# Altium PCB PCB1.PcbDoc
Units mm, origin at the board's own origin, x right, y up, seen from the top; angles counter-clockwise.
Board outline 70 x 60 mm, 2 copper layers (Top Layer, Bottom Layer); 83 components, 73 nets, 228 pads, 20 vias.
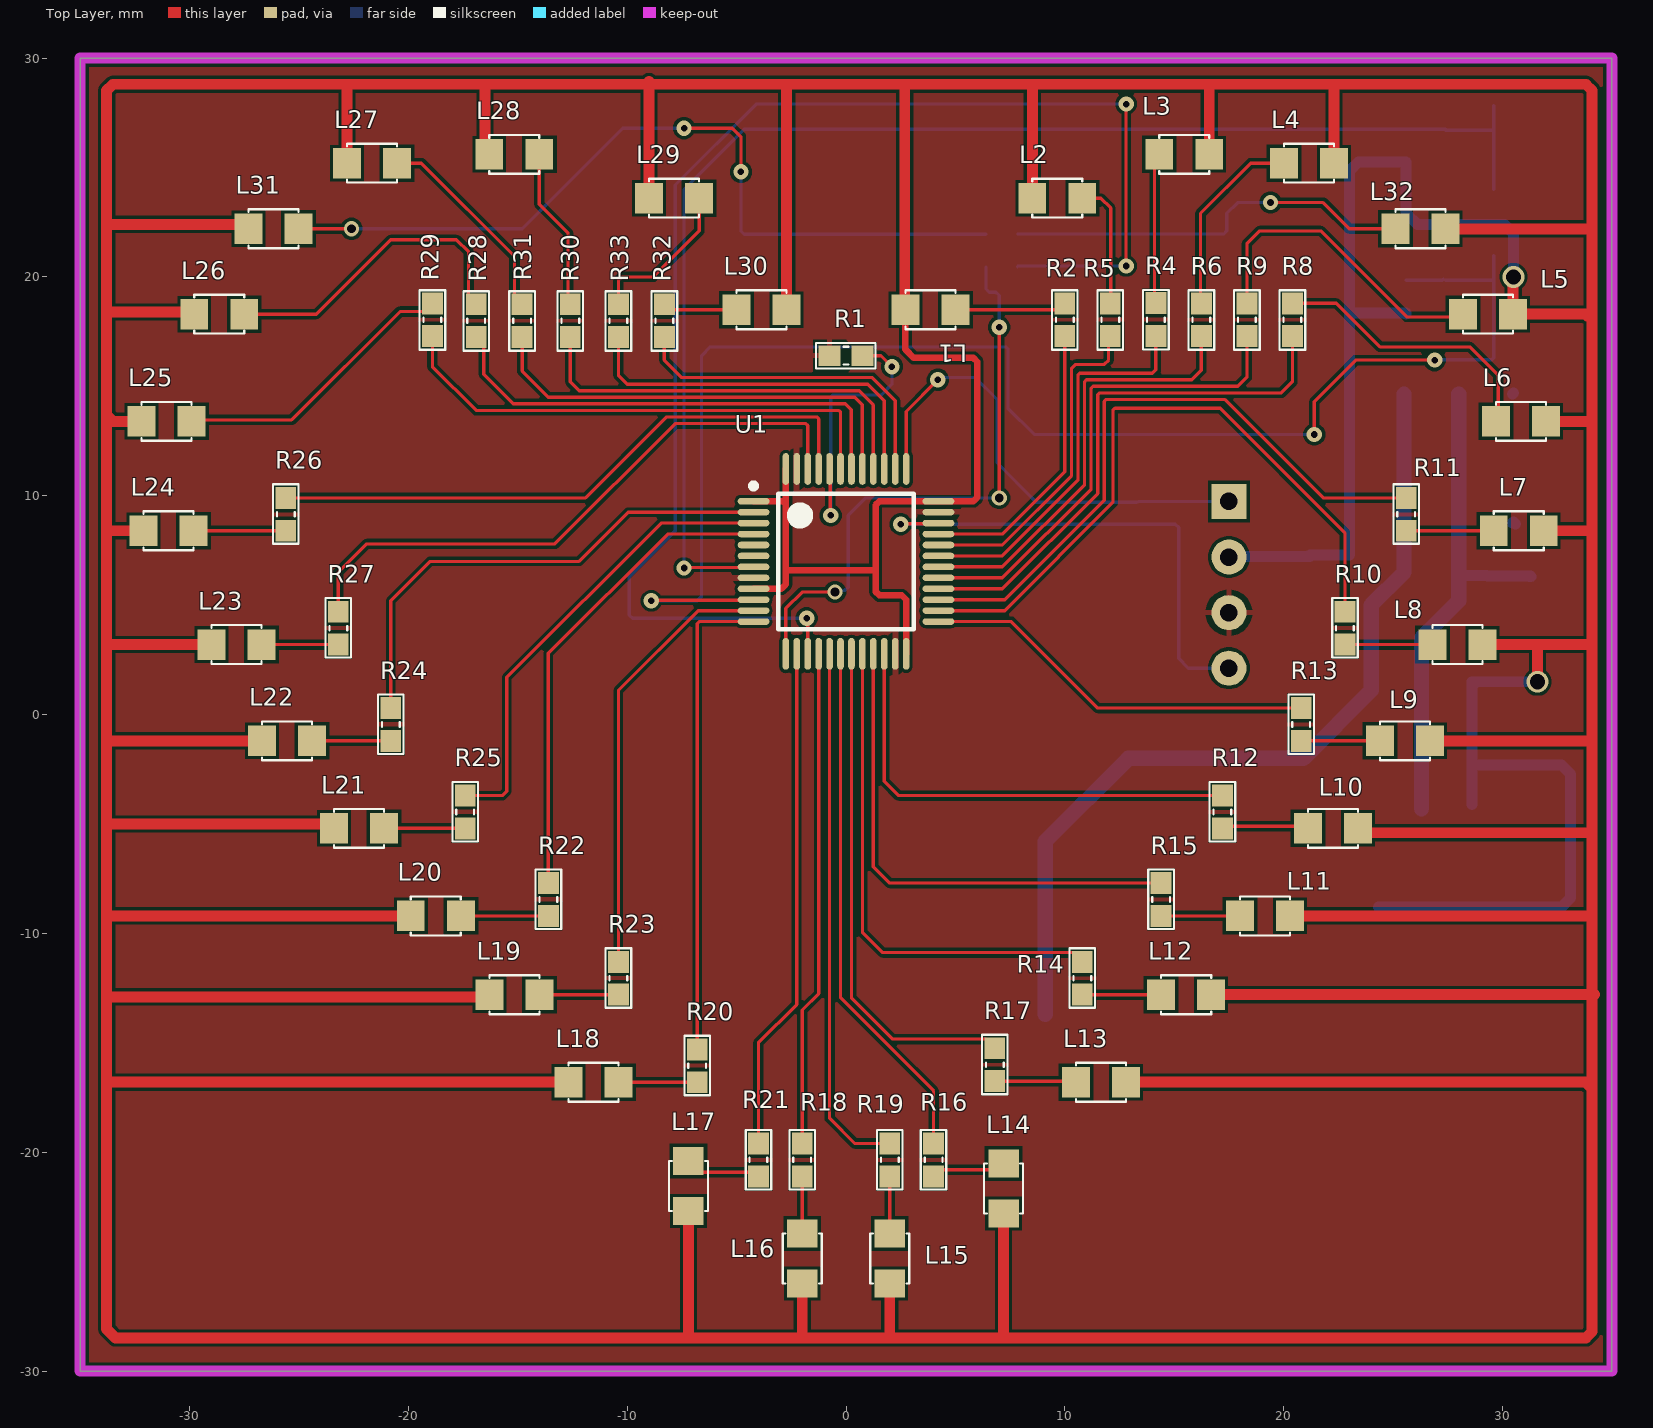
[diagram p0: Top Layer view]
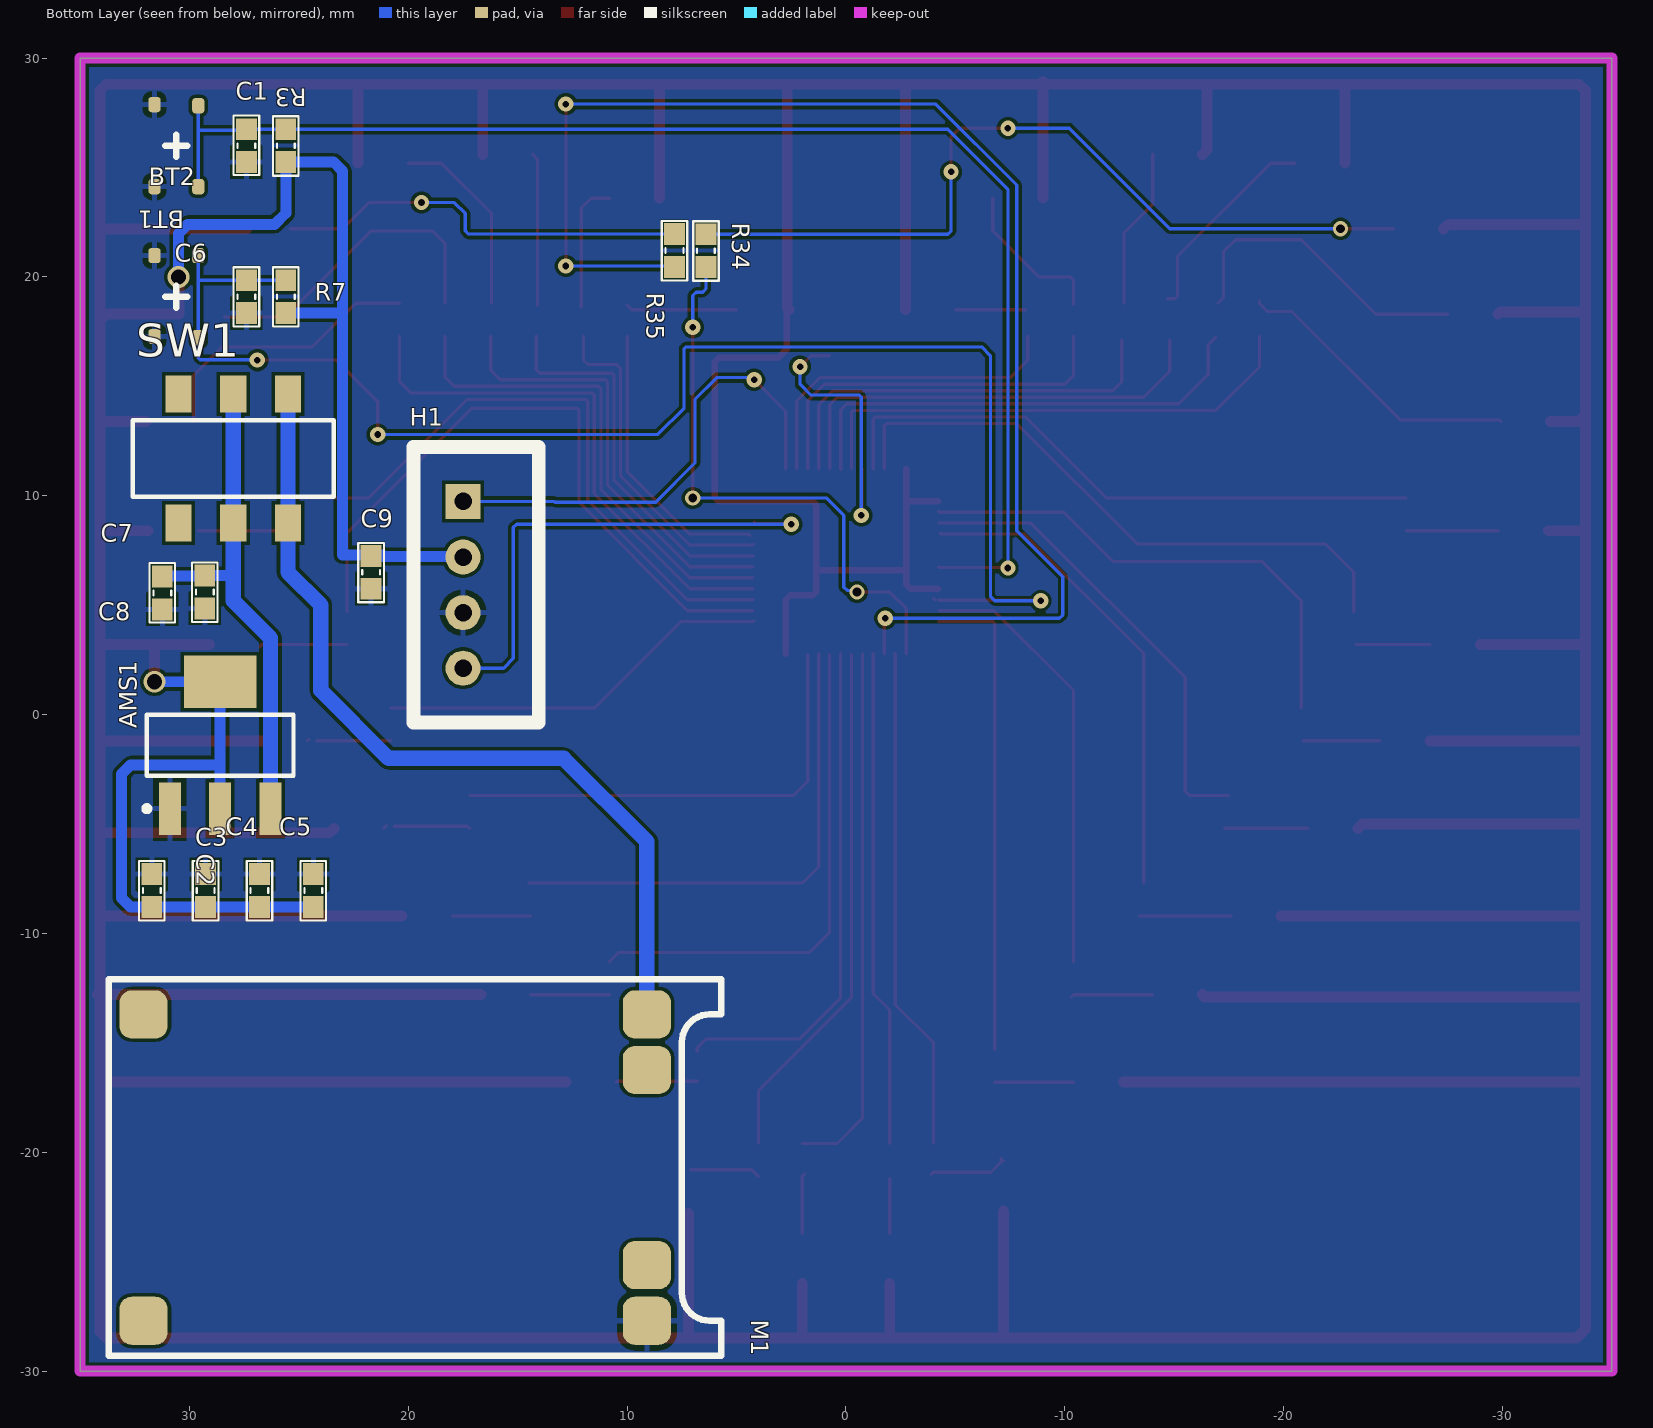
[diagram p1: Bottom Layer view, seen from below]
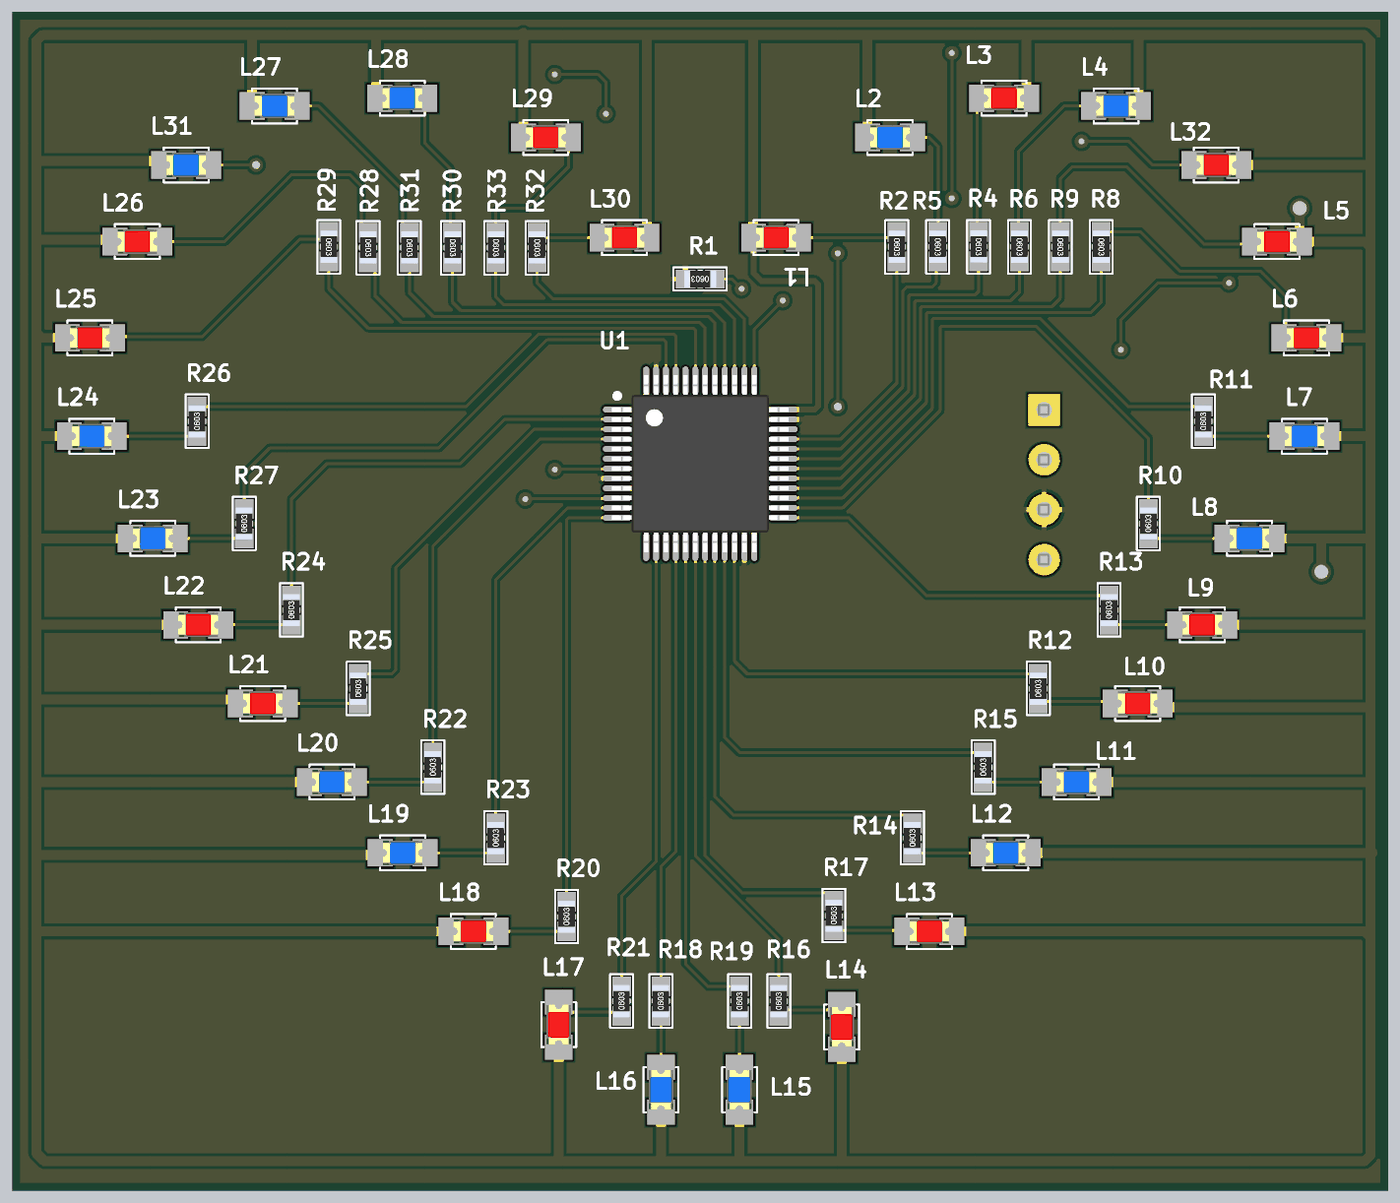
[diagram p2: 3D render of the assembled board from above, using the file's embedded part models]
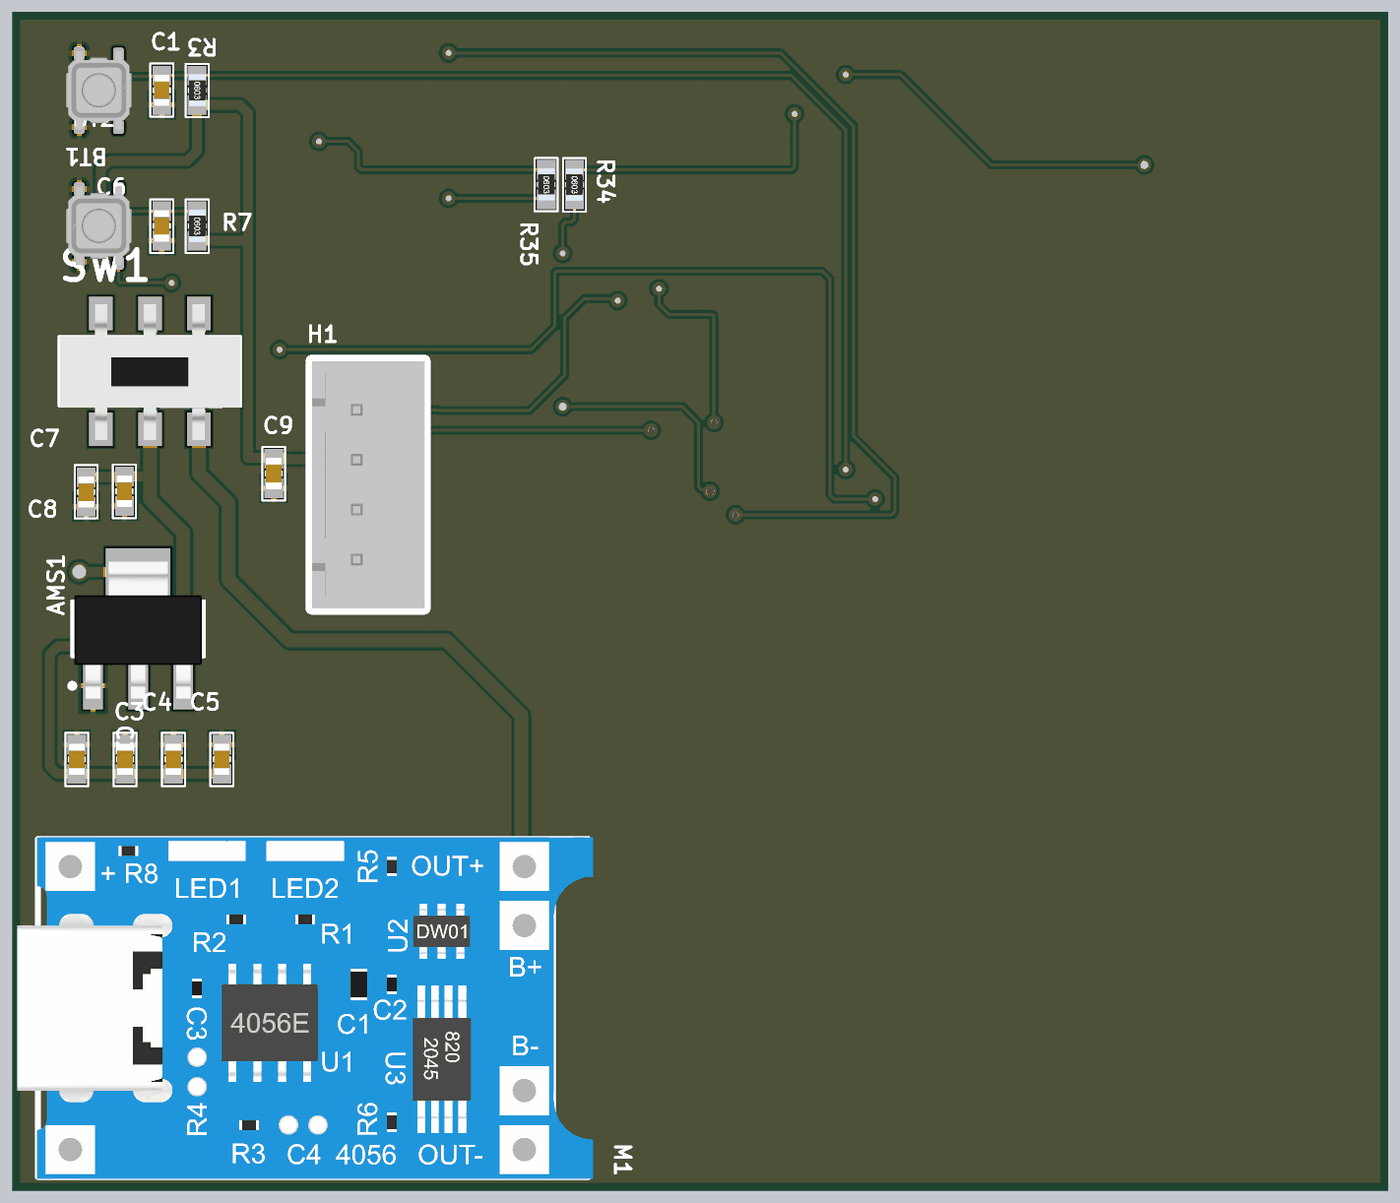
[diagram p3: 3D render of the assembled board from below, using the file's embedded part models]

## Layer stack, top to bottom
Top Solder: solder mask 0.0102, Solder Resist, Dk 3.5
Top Layer: signal copper 0.0356
Dielectric 1: dielectric 0.32, FR-4, Dk 4.8
Bottom Layer: signal copper 0.0356
Bottom Solder: solder mask 0.0102, Solder Resist, Dk 3.5

## Board outline
-35,-30 -35,30 35,30 35,-30

## Design rules (kind name [scope] priority, off if disabled: settings)
Clearance [All] p1: gap=0.15 ignorepadtopadclearanceinfootprint=FALSE
PolygonConnect [All] p1: connectstyle=Relief reliefconductorwidth=0.254 reliefentries=4 polygonreliefangle="90 Angle" airgapwidth=0.254
RoutingVias viapower [InNetClass('POWER')] p1: holewidth=0.7 width=1.1 viastyle="Through Hole" minholewidth=0.3 minwidth=0.7 maxholewidth=0.7 maxwidth=1.1
RoutingVias viath [InNetClass('Tin hieu')] p2: holewidth=0.3 width=0.7 viastyle="Through Hole" minholewidth=0.3 minwidth=0.7 maxholewidth=0.3 maxwidth=0.7
SolderMaskExpansion [All] p1: expansion=0.102 istentingtop=FALSE
Width "TIN HIEU" [InNetClass('Tin hieu')] p1: maxlimit=0.25 minlimit=0.15 preferedwidth=0.2
Width POWER [InNetClass('POWER')] p2: maxlimit=0.7 minlimit=0.3 preferedwidth=0.5
30 further rules are at their usual default settings.

## Components (designator, comment, footprint, x,y, rotation, side; value= is the part's Value field where it differs from the comment)
AMS1 "AMS1117-3.3V" SOT223 28.6,-1.4 r180 bottom value="AMS1117-3.3V SOT223"
BT1 "BUTTON-4PIN" BUTTON-3X3X1.5-4PIN 30.6,26 r270 bottom
BT2 "BUTTON-4PIN" BUTTON-3X3X1.5-4PIN 30.6,19.1 r90 bottom
C1 "104" "tu 0603" 27.4,26 r90 bottom
C2 "104" "tu 0603" 31.723,-8.041 r270 bottom
C3 "104" "tu 0603" 29.263,-8.041 r270 bottom
C4 "104" "tu 0603" 26.803,-8.041 r270 bottom
C5 "104" "tu 0603" 24.343,-8.041 r270 bottom
C6 "104" "tu 0603" 27.4,19.1 r270 bottom
C7 "106" "tu 0603" 29.3,5.6 r270 bottom
C8 "104" "tu 0603" 31.243,5.559 r90 bottom
C9 "106" "tu 0603" 21.7,6.5 r270 bottom
H1 "Header 4P 2.54 Duc Thang" XH2.54M-4 17.5,9.74 r270 bottom
L1 "LED 0805" LED-0805-Red 2.714,18.5 r0 top
L2 "LED 0805" LED-0805-Blue 8.514,23.6 r0 top
L3 "LED 0805" LED-0805-Red 16.6,25.6 r180 top
L4 "LED 0805" LED-0805-Blue 22.3,25.2 r180 top
L5 "LED 0805" LED-0805-Red 30.486,18.3 r180 top
L6 "LED 0805" LED-0805-Red 31.986,13.4 r180 top
L7 "LED 0805" LED-0805-Blue 31.886,8.4 r180 top
L8 "LED 0805" LED-0805-Blue 29.086,3.2 r180 top
L9 "LED 0805" LED-0805-Red 26.686,-1.2 r180 top
L10 "LED 0805" LED-0805-Red 23.4,-5.2 r180 top
L11 "LED 0805" LED-0805-Blue 20.286,-9.2 r180 top
L12 "LED 0805" LED-0805-Blue 16.686,-12.8 r180 top
L13 "LED 0805" LED-0805-Red 12.8,-16.8 r180 top
L14 "LED 0805" LED-0805-Red 7.2,-22.8 r90 top
L15 "LED 0805" LED-0805-Blue 2,-26 r90 top
L16 "LED 0805" LED-0805-Blue -2,-26 r90 top
L17 "LED 0805" LED-0805-Red -7.2,-22.686 r90 top
L18 "LED 0805" LED-0805-Red -12.686,-16.8 r0 top
L19 "LED 0805" LED-0805-Blue -16.286,-12.8 r0 top
L20 "LED 0805" LED-0805-Blue -19.886,-9.2 r0 top
L21 "LED 0805" LED-0805-Red -23.4,-5.2 r0 top
L22 "LED 0805" LED-0805-Red -26.686,-1.2 r0 top
L23 "LED 0805" LED-0805-Blue -29,3.2 r0 top
L24 "LED 0805" LED-0805-Blue -32.1,8.4 r0 top
L25 "LED 0805" LED-0805-Red -32.2,13.4 r0 top
L26 "LED 0805" LED-0805-Red -29.786,18.3 r0 top
L27 "LED 0805" LED-0805-Blue -22.8,25.2 r0 top
L28 "LED 0805" LED-0805-Blue -16.3,25.6 r0 top
L29 "LED 0805" LED-0805-Red -9,23.6 r0 top
L30 "LED 0805" LED-0805-Red -2.714,18.5 r180 top
L31 "LED 0805" LED-0805-Blue -27.3,22.2 r0 top
L32 "LED 0805" LED-0805-Red 27.4,22.2 r180 top
M1 "MODULE-TP4056" MODULE-TP4056 20.6,-20.7 r180 bottom locked
R1 "10K" "tro smd 0603" 0,16.4 r180 top
R2 "330" "tro smd 0603" 10,18.043 r270 top
R3 "10K" "tro smd 0603" 25.6,26 r270 bottom
R4 "330" "tro smd 0603" 14.16,18.05 r270 top
R5 "330" "tro smd 0603" 12.08,18.043 r270 top
R6 "330" "tro smd 0603" 16.24,18.043 r270 top
R7 "0R" "tro smd 0603" 25.6,19.1 r270 bottom
R8 "330" "tro smd 0603" 20.4,18.043 r270 top
R9 "330" "tro smd 0603" 18.32,18.043 r270 top
R10 "330" "tro smd 0603" 22.8,3.95 r90 top
R11 "330" "tro smd 0603" 25.6,9.15 r90 top
R12 "330" "tro smd 0603" 17.2,-4.45 r90 top
R13 "330" "tro smd 0603" 20.8,-0.45 r90 top
R14 "330" "tro smd 0603" 10.8,-12.05 r90 top
R15 "330" "tro smd 0603" 14.4,-8.45 r90 top
R16 "330" "tro smd 0603" 4,-20.35 r90 top
R17 "330" "tro smd 0603" 6.8,-16 r90 top
R18 "330" "tro smd 0603" -2,-20.35 r90 top
R19 "330" "tro smd 0603" 2,-20.35 r90 top
R20 "330" "tro smd 0603" -6.8,-16.05 r90 top
R21 "330" "tro smd 0603" -4,-20.35 r90 top
R22 "330" "tro smd 0603" -13.6,-8.45 r90 top
R23 "330" "tro smd 0603" -10.4,-12.05 r90 top
R24 "330" "tro smd 0603" -20.8,-0.45 r90 top
R25 "330" "tro smd 0603" -17.4,-4.45 r90 top
R26 "330" "tro smd 0603" -25.6,9.15 r90 top
R27 "330" "tro smd 0603" -23.2,3.95 r90 top
R28 "330" "tro smd 0603" -16.9,18 r270 top
R29 "330" "tro smd 0603" -18.9,18.043 r270 top
R30 "330" "tro smd 0603" -12.6,18 r270 top
R31 "330" "tro smd 0603" -14.8,18 r270 top
R32 "330" "tro smd 0603" -8.3,18 r270 top
R33 "330" "tro smd 0603" -10.4,18 r270 top
R34 "330" "tro smd 0603" 6.4,21.2 r270 bottom
R35 "330" "tro smd 0603" 7.836,21.209 r270 bottom
SW1 "MSS22D18" "MSS22D18 SMD" 28,11.7 r180 bottom
U1 "STM32F103xx_LQFP48" STM32_LQPF48 0,7 r0 top locked

## Footprints (in the part's own frame and the unit in brackets; to place one, negate y for a bottom-side part, rotate by r counter-clockwise, add the part's x,y. Pads: shape width x height; smd on the part's side, far side on the other; paste and mask are expansions set on the pad)
BUTTON-3X3X1.5-4PIN [mm]
  rrect50% 0.7x0.55 smd: 1(-1.875,-1) 2(1.875,-1) 3(1.875,1) 4(-1.825,1)
  silkscreen extent -0.5,-0.5 0.5,0.5, body extent -2,-1.68 2,1.68, height 1.5
LED-0805-Blue [mil]
  rect 50x55 smd: 1(0,0) 2(90,0)
  silkscreen extent 0,-35 90,35, body extent 5,-25 85,25, height 43
LED-0805-Red [mil]
  rect 50x55 smd: 1(0,0) 2(90,0)
  silkscreen extent 0,-35 90,35, body extent 5,-25 85,25, height 43
MODULE-TP4056 [mm]
  rrect50% 2.2x2.2 smd: 1(-11.5,-7) 2(-11.5,7) 3(11.5,-7) 4(11.5,7) 5(11.5,-4.46) 6(11.5,4.46)
  silkscreen extent -13.1,-8.6 14.9,8.6, body extent -14.15,-8.7 15.15,8.7, height 4.14
"MSS22D18 SMD" [mm]
  rect 1.2x1.7 smd: 1(-2.5,2.95) 2(0,2.95) 3(2.5,2.95) 4(-2.5,-2.95) 5(0,-2.95) 6(2.5,-2.95)
  silkscreen extent -4.6,-1.75 4.6,1.75, body extent -4.58,-3.49 4.58,3.42, height 5.95
SOT223 [mm]
  rect 1x2.4 smd: 1(-2.3,-2.9) 2(0,-2.9) 3(2.3,-2.9)
  rect 3.3x2.4 smd: 4(0,2.9)
  silkscreen extent -3.48,-3.02 3.35,1.4, body extent -3.25,-3.56 3.25,3.4, height 1.68
STM32_LQPF48 [mm]
  oval 1.45x0.3 smd: 1(-4.225,2.75) 2(-4.225,2.25) 3(-4.225,1.75) 4(-4.225,1.25) 5(-4.225,0.75) 6(-4.225,0.25) 7(-4.225,-0.25) 8(-4.225,-0.75) 9(-4.225,-1.25) 10(-4.225,-1.75) 11(-4.225,-2.25) 12(-4.225,-2.75) 25(4.225,-2.75) 26(4.225,-2.25) 27(4.225,-1.75) 28(4.225,-1.25) 29(4.225,-0.75) 30(4.225,-0.25) 31(4.225,0.25) 32(4.225,0.75) 33(4.225,1.25) 34(4.225,1.75) 35(4.225,2.25) 36(4.225,2.75)
  oval 0.3x1.45 smd: 13(-2.75,-4.225) 14(-2.25,-4.225) 15(-1.75,-4.225) 16(-1.25,-4.225) 17(-0.75,-4.225) 18(-0.25,-4.225) 19(0.25,-4.225) 20(0.75,-4.225) 21(1.25,-4.225) 22(1.75,-4.225) 23(2.25,-4.225) 24(2.75,-4.225) 37(2.75,4.225) 38(2.25,4.225) 39(1.75,4.225) 40(1.25,4.225) 41(0.75,4.225) 42(0.25,4.225) 43(-0.25,4.225) 44(-0.75,4.225) 45(-1.25,4.225) 46(-1.75,4.225) 47(-2.25,4.225) 48(-2.75,4.225)
  silkscreen extent -4.35,-3.1 3.1,3.57, body extent -4.5,-4.5 4.5,4.5, height 1.6
"tro smd 0603" [mm] "Chip Capacitor, 2-Leads, Body 1,60x0,80mm, IPC Medium Density"
  rect 1x0.95 smd mask+0.076: 1(-0.75,0) 2(0.75,0)
  silkscreen extent -1.35,-0.58 1.37,0.58, body extent -0.82,-0.42 0.82,0.43, height 0.44
"tu 0603" [mm] "Chip Capacitor, 2-Leads, Body 1,60x0,80mm, IPC Medium Density"
  rect 1x0.95 smd mask+0.076: 1(-0.75,0) 2(0.75,0)
  silkscreen extent -1.35,-0.58 1.37,0.58, body extent -0.8,-0.4 0.8,0.4, height 0.9
XH2.54M-4 [mm]
  rect 1.6x1.6 hole 0.8: 1(0,0)
  round 1.6 hole 0.8: 2(2.54,0) 3(5.08,0) 4(7.62,0)
  silkscreen extent -2.48,-2.26 10.1,3.46, body extent -2.48,-2.26 10.1,3.48, height 6.91

## Part data
AMS1: library part "AMS1117 SMD", "Dán", Chung_Loai=Dán, Don_Vi=Con, Ma_Hang=MH000596
C1 C2 C3 C4 C5 C6 C8: library part "Tu 0603 104 50V 10%", "Dán", Chung_Loai=Dán, Don_Vi=Con, Ma_Hang=MH004568, So_Chan=2, Ten_Linh_Kien="Tụ 0603 104-100nF 10% 50V"
C7 C9: library part "Tu 0603 106 16V 20%", "Dán", Chung_Loai=Dán, Don_Vi=Con, Ma_Hang=MH004848, So_Chan=2, Ten_Linh_Kien="Tụ 0603-10uF 20% 16V"
H1: "Cắm", Chung_Loai=Cắm, Don_Vi=Con, Ma_Hang=MH001285, Ten_Linh_Kien="Header 4P XH2.54-4P Đực Thẳng"
L1 L3 L5 L6 L9 L10 L13 L14 L17 L18 L21 L22 L25 L26 L29 L30 L32: library part "LED 0805 Do", "Dán", Chung_Loai=Dán, Don_Vi=Con, Ma_Hang=MH000897, Ten_Linh_Kien="LED 0805 Màu Đỏ (Red)"
L2 L4 L7 L8 L11 L12 L15 L16 L19 L20 L23 L24 L27 L28 L31: library part "LED 0805 Xanh Duong", "Dán", Chung_Loai=Dán, Don_Vi=Con, Ma_Hang=MH002327, Ten_Linh_Kien="LED 0805 Màu Xanh Dương (Blue)"
R1 R2 R3 R4 R5 R6 R7 R8 R9 R10 R11 R12 R13 R14 R15 R16 R17 R18 R19 R20 R21 R22 R23 R24 R25 R26 R27 R28 R29 R30 R31 R32 R33 R34 R35: library part "Tro 0603 1% 0R", "Dán", Chung_Loai=Dán, Don_Vi=Con, Ma_Hang=MH005792, So_Chan=2, Ten_Linh_Kien="Trở 0603 1% 0R"
SW1: "SMD"
U1: ComponentLink1Description="Manufacturer Link", ComponentLink1URL=www.st.com/stm32, ComponentLink2Description=Datasheet, ComponentLink2URL=http://www.st.com/stonline/products/literature/ds/13587.pdf, DatasheetVersion="rev6, Mar-2008", PackageDescription="48-Pin Low-Profile Quad Flat Pack, 7 x 7 mm Body, 0.5 mm Pitch (LQFP48)", PackageReference=LQFP48, PackageVersion=Mar-2008, Published=30-May-2008, Publisher="Altium Limited"

## Via types
v1: diameter 0.7, hole 0.3, Top Layer to Bottom Layer, tented both sides, 15 vias
v2: diameter 0.7, hole 0.4, Top Layer to Bottom Layer, tented both sides, 3 vias
v3: diameter 1, hole 0.7, Top Layer to Bottom Layer, tented both sides, 2 vias

## Nets (pads, with @x,y where several pads share a name; then routed paths per layer and width w, separated by ;. In a path a pad name is that pad's centre, name@x,y a point inside that pad or via, vN(x,y) a via of type N, cw(c..) or ccw(c..) an arc to the next point about the centre after c; other vN are vias at no path point)
+3.3V: AMS1.2 AMS1.4 C2.2 C3.2 C4.2 C5.2 C9.1 H1.2 L1.1 L2.1 L3.1 L4.1 L5.1 L6.1 L7.1 L8.1 L9.1 L10.1 L11.1 L12.1 L13.1 L14.1 L15.1 L16.1 L17.1 L18.1 L19.1 L20.1 L21.1 L22.1 L23.1 L24.1 L25.1 L26.1 L27.1 L28.1 L29.1 L30.1 L31.1 L32.1 R3.2 R7.2 U1.1 U1.9 U1.24 U1.36 U1.48 | length 595.5
  Top Layer w0.3: U1.9 -2.95,5.75 -2.75,5.95 -2.75,9.9 U1.48 ; U1.1 -2.876,9.75 ; -2.863,9.737 -2.82,9.71 ; -2.7,6.6 1.35,6.6 ; L1.1 2.714,16.686 3.1,16.3 5.824,16.3 6,16.124 6,9.926 5.824,9.75 U1.36 1.526,9.75 1.35,9.574 1.35,6.6 ; U1.24 2.75,5.25 2.55,5.45 1.526,5.45 1.35,5.626 1.35,6.6
  Top Layer w0.5: -33.7,3.2 L23.1 ; -33.7,13.6 -33.5,13.4 L25.1 ; -33.7,22.4 -27.5,22.4 L31.1 ; -33.6,8.4 L24.1 ; -33.6,18.4 -29.886,18.4 L26.1 ; L22.1 -33.786,-1.2 ; L21.1 -23.6,-5 -33.786,-5 ; L27.1 -22.8,28.804 ; L20.1 -33.7,-9.2 -33.786,-9.286 ; L28.1 -16.5,25.8 -16.5,28.804 ; L19.1 -16.386,-12.9 -33.786,-12.9 ; L18.1 -33.7,-16.8 -33.786,-16.714 ; L29.1 -9,28.921 ; L17.1 -7.2,-28.486 ; L30.1 -2.714,28.786 -2.7,28.8 ; L16.1 -2,-28.486 ; L15.1 2,-28.486 ; L1.1@2.6,18.5 2.686,18.586 2.686,28.804 ; L14.1 7.2,-28.4 7.114,-28.486 ; L2.1 8.514,28.804 ; L13.1 33.8,-16.8 34,-17 ; L3.1 16.6,28.79 ; L12.1 34.2,-12.8 ; L11.1 34.1,-9.2 ; L4.1 22.3,28.804 ; L10.1 23.6,-5.4 34,-5.4 ; L9.1 33.9,-1.2 ; L32.1@27.5,22.3 L32.1 34.1,22.2 ; L8.1 34.1,3.2 ; v3(30.5,20) 30.486,19.986 L5.1 33.8,18.3 33.9,18.2 ; v3(31.6,1.5) 31.6,3.2 ; L7.1 34.1,8.4 ; L6.1 34.1,13.4 ; -33.786,-16.714 -33.786,-12.9 ; -33.786,-16.714 -33.786,-28.076 -33.376,-28.486 -7.2,-28.486 ; -33.786,-12.9 -33.786,-9.286 ; -33.786,-9.286 -33.786,-5 ; -33.786,-5 -33.786,-1.2 ; -33.786,-1.2 -33.786,28.511 -33.493,28.804 -22.8,28.804 ; -22.8,28.804 -16.5,28.804 ; -16.5,28.804 2.686,28.804 ; -7.2,-28.486 -2,-28.486 ; -2,-28.486 2,-28.486 ; 2,-28.486 7.114,-28.486 ; 2.686,28.804 8.514,28.804 ; 7.114,-28.486 33.807,-28.486 34.1,-28.193 34.1,-9.2 ; 8.514,28.804 22.3,28.804 ; 22.3,28.804 33.807,28.804 34.1,28.511 34.1,22.2 ; 34.1,-9.2 34.1,3.2 ; 34.1,3.2 34.1,8.4 ; 34.1,8.4 34.1,13.4 ; 34.1,13.4 34.1,22.2
  Bottom Layer w0.5: H1.2 17.525,7.225 21.2,7.225 ; 21.2,7.3 23,7.3 23,18.2 ; C5.2 26.791,-8.791 26.8,-8.8 26.809,-8.791 C3.2 C2.2 32.69,-8.791 33.1,-8.381 33.1,-2.71 32.69,-2.3 28.7,-2.3 ; R7.2@25.6,18.3 R7.2@25.55,18.35 ; R7.2 R7.2@25.55,18.35 ; AMS1.2@28.6,-4.1 AMS1.4@28.6,1.3 ; AMS1.4@28.7,1.4 AMS1.4@28.6,1.3 ; v3(30.5,20) 30.5,21.99 30.09,22.4 26.11,22.4 25.6,22.91 R3.2 23.41,25.25 23,24.84 23,18.2 ; v3(31.6,1.5) AMS1.4 AMS1.4@28.6,1.3 ; 23,18.2 23.15,18.35 R7.2@25.55,18.35
+5V: M1.4 SW1.3 SW1.6 | length 39.8
  Bottom Layer w0.7: M1.4 9.1,-5.8 12.9,-2 20.9,-2 24,1.1 24,5 25.5,6.5 SW1.6 ; SW1.6@25.5,8.8 SW1.3
BUTTON: BT2.1 BT2.2 C6.1 R7.1 U1.10 | length 68.6
  Top Layer w0.15: v1(-8.9,5.2) -8.875,5.225 -4.25,5.225 U1.10 ; U1.10@-4.05,5.25 U1.10@-4,5.3 ; v1(21.4,12.8) 21.4,14.3 23.3,16.2 v1(26.9,16.2)
  Bottom Layer w0.15: v1(-8.9,5.2) -6.8,5.2 -6.6,5.4 -6.6,16.4 -6.2,16.8 7.312,16.8 7.4,16.712 7.4,14 8.6,12.8 v1(21.4,12.8) ; R7.1 27.25,19.85 C6.1@27.3,19.9 ; v1@26.9,16.212 29.512,16.212 29.6,16.3 BT2.1 ; C6.1 29.55,19.85 29.6,19.9 ; BT2.1@29.6,17.3 BT2.2
GND: AMS1.1 BT1.1 BT1.2 BT2.3 BT2.4 C1.1 C2.1 C3.1 C4.1 C5.1 C6.2 C7.2 C8.1 C9.2 H1.3 M1.3 R1.2 U1.8 U1.23 U1.35 U1.47
LED1: R2.2 U1.33 | length 13
  Top Layer w0.15: U1.33@4.4,8.2 4.45,8.25 7.15,8.25 10,11.1 R2.2
LED2: R5.2 U1.32 | length 15.3
  Top Layer w0.15: U1.32@4.2,7.8 4.25,7.75 7.15,7.75 10.3,10.9 10.3,15.8 10.5,16 11.8,16 12,16.2 R5.2@12,17.3
LED3: R4.2 U1.31 | length 17.8
  Top Layer w0.15: U1.31 7.15,7.25 10.6,10.7 10.6,15.512 10.688,15.6 14,15.6 14.16,15.76 R4.2
LED4: R6.2 U1.30 | length 20
  Top Layer w0.15: U1.30@4.25,6.75 7.15,6.75 10.9,10.5 10.9,15.212 10.988,15.3 15.8,15.3 16.24,15.74 R6.2
LED5: R9.2 U1.29 | length 22.4
  Top Layer w0.15: U1.29@4.25,6.25 7.15,6.25 11.2,10.3 11.2,14.912 11.288,15 17.9,15 18.32,15.42 R9.2
LED6: R8.2 U1.28 | length 24.8
  Top Layer w0.15: U1.28@4.25,5.75 7.15,5.75 11.5,10.1 11.5,14.612 11.588,14.7 19.9,14.7 20.4,15.2 R8.2
LED7: R11.2 U1.27 | length 29.6
  Top Layer w0.15: U1.27@4.25,5.25 7.25,5.25 11.8,9.8 11.8,14.312 11.888,14.4 17.3,14.4 21.8,9.9 R11.2
LED8: R10.2 U1.26 | length 30.8
  Top Layer w0.15: U1.26@4.25,4.75 7.25,4.75 12.2,9.7 12.2,13.912 12.288,14 17.1,14 22.8,8.3 R10.2
LED9: R13.2 U1.25 | length 18.3
  Top Layer w0.15: U1.25@4.2,4.3 4.25,4.25 7.55,4.25 11.5,0.3 R13.2
LED10: R12.2 U1.22 | length 21.5
  Top Layer w0.15: U1.22@1.75,2.75 1.75,-3.05 2.4,-3.7 R12.2
LED11: R15.2 U1.21 | length 23.3
  Top Layer w0.15: U1.21 1.25,-6.95 2,-7.7 R15.2@14.5,-7.7
LED12: R14.2 U1.20 | length 23.3
  Top Layer w0.15: U1.20@0.75,2.75 0.75,-9.95 1.675,-10.875 10.4,-10.875 10.8,-11.275 R14.2
LED13: R17.2 U1.19 | length 23.4
  Top Layer w0.15: U1.19 0.25,-12.95 2.128,-14.828 6.4,-14.828 6.8,-15.228 R17.2@6.8,-15.4
LED14: R16.2 U1.18 | length 24.1
  Top Layer w0.15: U1.18@-0.25,2.75 -0.25,-12.95 4,-17.2 R16.2
LED15: R19.2 U1.17 | length 24.5
  Top Layer w0.15: U1.17 -0.75,-18.45 0.4,-19.6 R19.2
LED16: R18.2 U1.16 | length 22.7
  Top Layer w0.15: R18.2 -2,-13.5 -1.25,-12.75 U1.16
LED17: R21.2 U1.14 | length 23.1
  Top Layer w0.15: R21.2 -4,-15 -2.25,-13.25 U1.14
LED18: R20.2 U1.12 | length 22.1
  Top Layer w0.15: R20.2 -6.8,4.162 -6.712,4.25 U1.12
LED19: R23.2 U1.11 | length 20.1
  Top Layer w0.15: R23.2 -10.4,1.1 -6.75,4.75 U1.11@-4.25,4.75
LED20: R22.2 U1.4 | length 22.1
  Top Layer w0.15: R22.2 -13.6,2.8 -8.15,8.25 -4.35,8.25 U1.4@-4.3,8.3
LED21: R25.2 U1.3 | length 21.5
  Top Layer w0.15: R25.2@-17.5,-3.7 -15.7,-3.7 -15.5,-3.5 -15.5,1.7 -8.45,8.75 U1.3
LED22: R24.2 U1.2 | length 23.2
  Top Layer w0.15: R24.2 -20.8,5.2 -19,7 -12.2,7 -9.95,9.25 -4.25,9.25 U1.2@-4.2,9.3
LED23: R27.2 U1.46 | length 28.1
  Top Layer w0.15: R27.2 -23.2,6.5 -21.9,7.8 -13.3,7.8 -7.8,13.3 -1.838,13.3 -1.75,13.212 U1.46
LED24: R26.2 U1.45 | length 28.2
  Top Layer w0.15: R26.2 -11.9,9.9 -8.2,13.6 -1.338,13.6 -1.25,13.512 U1.45
LED25: R29.2 U1.43 | length 23.5
  Top Layer w0.15: R29.2 -18.9,15.9 -16.9,13.9 -0.338,13.9 -0.25,13.812 U1.43
LED26: R28.2 U1.42 | length 22
  Top Layer w0.15: R28.2 -16.55,16.9 -16.55,15.55 -15.2,14.2 -0.034,14.2 0.24,13.926 U1.42@0.24,11.214
LED27: R31.2 U1.41 | length 20.5
  Top Layer w0.15: R31.2@-14.8,17.1 -14.8,15.7 -13.6,14.5 0.4,14.5 0.74,14.16 0.74,11.235 U1.41
LED28: R30.2 U1.40 | length 19.1
  Top Layer w0.15: R30.2@-12.6,17.1 -12.6,15.2 -12.2,14.8 0.6,14.8 1.25,14.15 U1.40
LED29: R33.2 U1.39 | length 17.6
  Top Layer w0.15: R33.2@-10.4,17.3 -10.4,15.5 -10,15.1 1,15.1 1.75,14.35 U1.39
LED30: R32.2 U1.38 | length 15.5
  Top Layer w0.15: R32.2@-8.3,17.3 R32.2 -8.3,16.2 -7.5,15.4 1.2,15.4 2.25,14.35 U1.38
LED31: R34.2 U1.13 | length 26.8
  Top Layer w0.15: U1.13 -2.75,4.85 -2,5.6 v2(-0.5,5.6) ; v2(7,9.9) v1(7,17.7)
  Bottom Layer w0.15: v2(-0.5,5.6) -0.425,5.675 -0.049,5.675 0.1,5.823 0.1,9.1 0.9,9.9 v2(7,9.9) ; R34.2 6.4,19.449 6.549,19.3 6.851,19.3 7,19.151 v1(7,17.7)
LED32: R35.2 U1.15 | length 64.8
  Top Layer w0.15: v1(-1.8,4.4) -1.75,4.35 U1.15 ; v1(12.8,20.5) v1(12.8,27.9)
  Bottom Layer w0.15: v1(-1.8,4.4) -9.751,4.4 -9.9,4.549 -9.9,6.3 -7.8,8.4 -7.8,24.2 -4.1,27.9 v1(12.8,27.9) ; R35.2 7.877,20.5 v1(12.8,20.5)
NetAMS1_3: AMS1.3 C7.1 C8.2 SW1.2 SW1.5 | length 23
  Bottom Layer w0.5: 28,6.3 28.05,6.35 C7.1 29.32,6.33 31.223,6.33 C8.2 ; C8.2@31.27,6.33 C8.2@31.3,6.3
  Bottom Layer w0.7: AMS1.3 26.3,3.5 28,5.2 28,6.3 SW1.5 SW1.2
NetBT1_3: BT1.3 BT1.4 C1.2 R3.1 U1.7 | length 62.5
  Top Layer w0.15: v1(-7.4,6.7) -7.375,6.725 -4.25,6.725 U1.7
  Bottom Layer w0.15: v1(-7.4,6.7) -7.4,24 -4.65,26.75 R3.1 27.35,26.75 C1.2@27.4,26.7 ; C1.2 27.45,26.7 29.6,26.7 ; BT1.3@29.6,24 BT1.3 BT1.4
NetH1_1: H1.1 U1.37 | length 22.1
  Top Layer w0.15: U1.37 2.75,13.85 v1(4.2,15.3)
  Bottom Layer w0.15: v1(4.2,15.3) 4.3,15.4 5.9,15.4 6.9,14.4 6.9,11.5 8.7,9.7 13.3,9.7 13.34,9.74 H1.1
NetH1_4: H1.4 U1.34 | length 23
  Top Layer w0.15: v1(2.5,8.7) 2.525,8.725 4.125,8.725 U1.34@4.2,8.8
  Bottom Layer w0.15: v1(2.5,8.7) 15.054,8.7 15.2,8.554 15.2,2.566 15.646,2.12 H1.4
NetL1_2: L1.2 R2.1 | length 5.1
  Top Layer w0.15: L1.2 9.8,18.5 R2.1@10,18.7
NetL2_2: L2.2 R5.1 | length 6
  Top Layer w0.15: L2.2 11.651,23.6 12.1,23.151 R5.1@12.1,18.6
NetL3_2: L3.2 R4.1 | length 7
  Top Layer w0.15: R4.1@14.1,18.7 14.1,25.386 L3.2
NetL4_2: L4.2 R6.1 | length 8.9
  Top Layer w0.15: R6.1@16.2,18.8 16.2,22.9 18.5,25.2 L4.2
NetL5_2: L5.2 R9.1 | length 14.7
  Top Layer w0.15: R9.1 18.32,21.52 18.9,22.1 21.7,22.1 25.628,18.172 L5.2@28.428,18.172
NetL6_2: L6.2 R8.1 | length 12.9
  Top Layer w0.15: R8.1 22.407,18.793 24.4,16.8 28.5,16.8 29.8,15.5 L6.2@29.8,13.4
NetL7_2: L7.2 R11.1 | length 4
  Top Layer w0.15: R11.1 L7.2
NetL8_2: L8.2 R10.1 | length 4
  Top Layer w0.15: R10.1 26.7,3.2 L8.2@26.8,3.1
NetL9_2: L9.2 R13.1 | length 3.4
  Top Layer w0.15: R13.1 L9.2@24.202,-1.2
NetL10_2: L10.2 R12.1 | length 3.5
  Top Layer w0.15: R12.1 17.3,-5.1 L10.2@20.648,-5.1
NetL11_2: L11.2 R15.1 | length 3.6
  Top Layer w0.15: R15.1 L11.2
NetL12_2: L12.2 R14.1 | length 3.6
  Top Layer w0.15: R14.1 L12.2
NetL13_2: L13.2 R17.1 | length 3.7
  Top Layer w0.15: R17.1 10.45,-16.75 L13.2@10.5,-16.8
NetL14_2: L14.2 R16.1 | length 3.2
  Top Layer w0.15: R16.1 4.3,-20.8 L14.2@7.1,-20.8
NetL15_2: L15.2 R19.1 | length 2.8
  Top Layer w0.15: R19.1@1.9,-21 R19.1 L15.2
NetL16_2: L16.2 R18.1 | length 2.5
  Top Layer w0.15: L16.2 R18.1@-2,-21.2
NetL17_2: L17.2 R21.1 | length 3.7
  Top Layer w0.15: L17.2 -7.1,-20.3 -7.1,-20.436 -6.627,-20.91 -3.99,-20.91 R21.1@-3.9,-21
NetL18_2: L18.2 R20.1 | length 3.6
  Top Layer w0.15: L18.2 R20.1
NetL19_2: L19.2 R23.1 | length 3.7
  Top Layer w0.15: L19.2 R23.1 R23.1@-10.3,-12.9
NetL20_2: L20.2 R22.1 | length 4.2
  Top Layer w0.15: L20.2 R22.1 R22.1@-13.4,-9.2
NetL21_2: L21.2 R25.1 | length 3.8
  Top Layer w0.15: L21.2 R25.1 R25.1@-17.3,-5.2
NetL22_2: L22.2 R24.1 | length 3.5
  Top Layer w0.15: L22.2 R24.1@-20.9,-1.2
NetL23_2: L23.2 R27.1 | length 3.4
  Top Layer w0.15: L23.2 R27.1@-23.3,3.2
NetL24_2: L24.2 R26.1 | length 4.2
  Top Layer w0.15: L24.2 R26.1
NetL25_2: L25.2 R29.1 | length 13.4
  Top Layer w0.15: L25.2 -29.851,13.464 -25.336,13.464 -20.38,18.42 -19.248,18.42 -18.9,18.768 R29.1@-18.9,18.9
NetL26_2: L26.2 R28.1 | length 14.3
  Top Layer w0.15: L26.2 -24.2,18.3 -20.8,21.7 -17.8,21.7 -17.248,21.148 -17.248,19.048 R28.1@-17,18.8
NetL27_2: L27.2 R31.1 | length 9.5
  Top Layer w0.15: L27.2 -19.4,25.2 -15.148,20.948 -15.148,19.123 -15.025,19 R31.1@-14.7,19
NetL28_2: L28.2 R30.1 | length 7.3
  Top Layer w0.15: L28.2 -14.014,23.314 -12.7,22 R30.1@-12.7,18.8
NetL29_2: L29.2 R33.1 | length 7.2
  Top Layer w0.15: R33.1 -10.4,19.851 -10.251,20 -8.8,20 -6.7,22.1 L29.2@-6.7,23.6
NetL30_2: L30.2 R32.1 | length 3.2
  Top Layer w0.15: R32.1@-8.2,18.5 L30.2
NetL31_2: L31.2 R34.1 | length 37.8
  Top Layer w0.15: L31.2 v2(-22.6,22.2) ; v1(-7.4,26.8) -5.2,26.8 -4.8,26.4 v1(-4.8,24.8)
  Bottom Layer w0.15: v2(-22.6,22.2) -14.8,22.2 -10.2,26.8 v1(-7.4,26.8) ; v1(-4.8,24.8) -4.8,22.099 -4.651,21.95 R34.1
NetL32_2: L32.2 R35.1 | length 19.1
  Top Layer w0.15: v1(19.4,23.4) 21.8,23.4 23,22.2 L32.2@25.4,22.2
  Bottom Layer w0.15: R35.1 17.251,21.959 17.4,22.108 17.4,22.9 17.9,23.4 v1(19.4,23.4)
NetR1_1: R1.1 U1.44 | length 13
  Top Layer w0.15: U1.44 -0.725,11.2 -0.725,9.125 v1(-0.7,9.1) ; R1.1 1.6,16.4 v1(2.1,15.9)
  Bottom Layer w0.15: v1(-0.7,9.1) -0.7,14.512 -0.612,14.6 1.6,14.6 2.1,15.1 v1(2.1,15.9)
pads on no net: M1.1 M1.2 M1.5 M1.6 SW1.1 SW1.4 U1.5 U1.6
copper on no net: | length 0.5
  Top Layer w0.15: 21,-5.086 21.114,-5.2 ; 24.55,-1.15 24.6,-1.2
  Bottom Layer w0.5: 30.45,8.75 30.5,8.8 30.6,8.7 ; 30.45,14.65 30.5,14.7

## Polygon pours and split planes (outlines as drawn)
GND on Top Layer "GND_L01_P001" (solid, pour order 1): -35,-30 -35,30 35,30 35,-30
GND on Bottom Layer "GND_L02_P000" (solid, pour order 0): -35,-30 -35,30 35,30 35,-30

## Keep-outs
Keep-Out Layer:
  the board outline again, w0.5